# Altium PCB led.PcbDoc
Units mm, origin at the board's own origin, x right, y up, seen from the top; angles counter-clockwise.
Board outline 56.77 x 43.05 mm, 2 copper layers (Top Layer, Bottom Layer); 18 components, 16 nets, 57 pads, 0 vias.
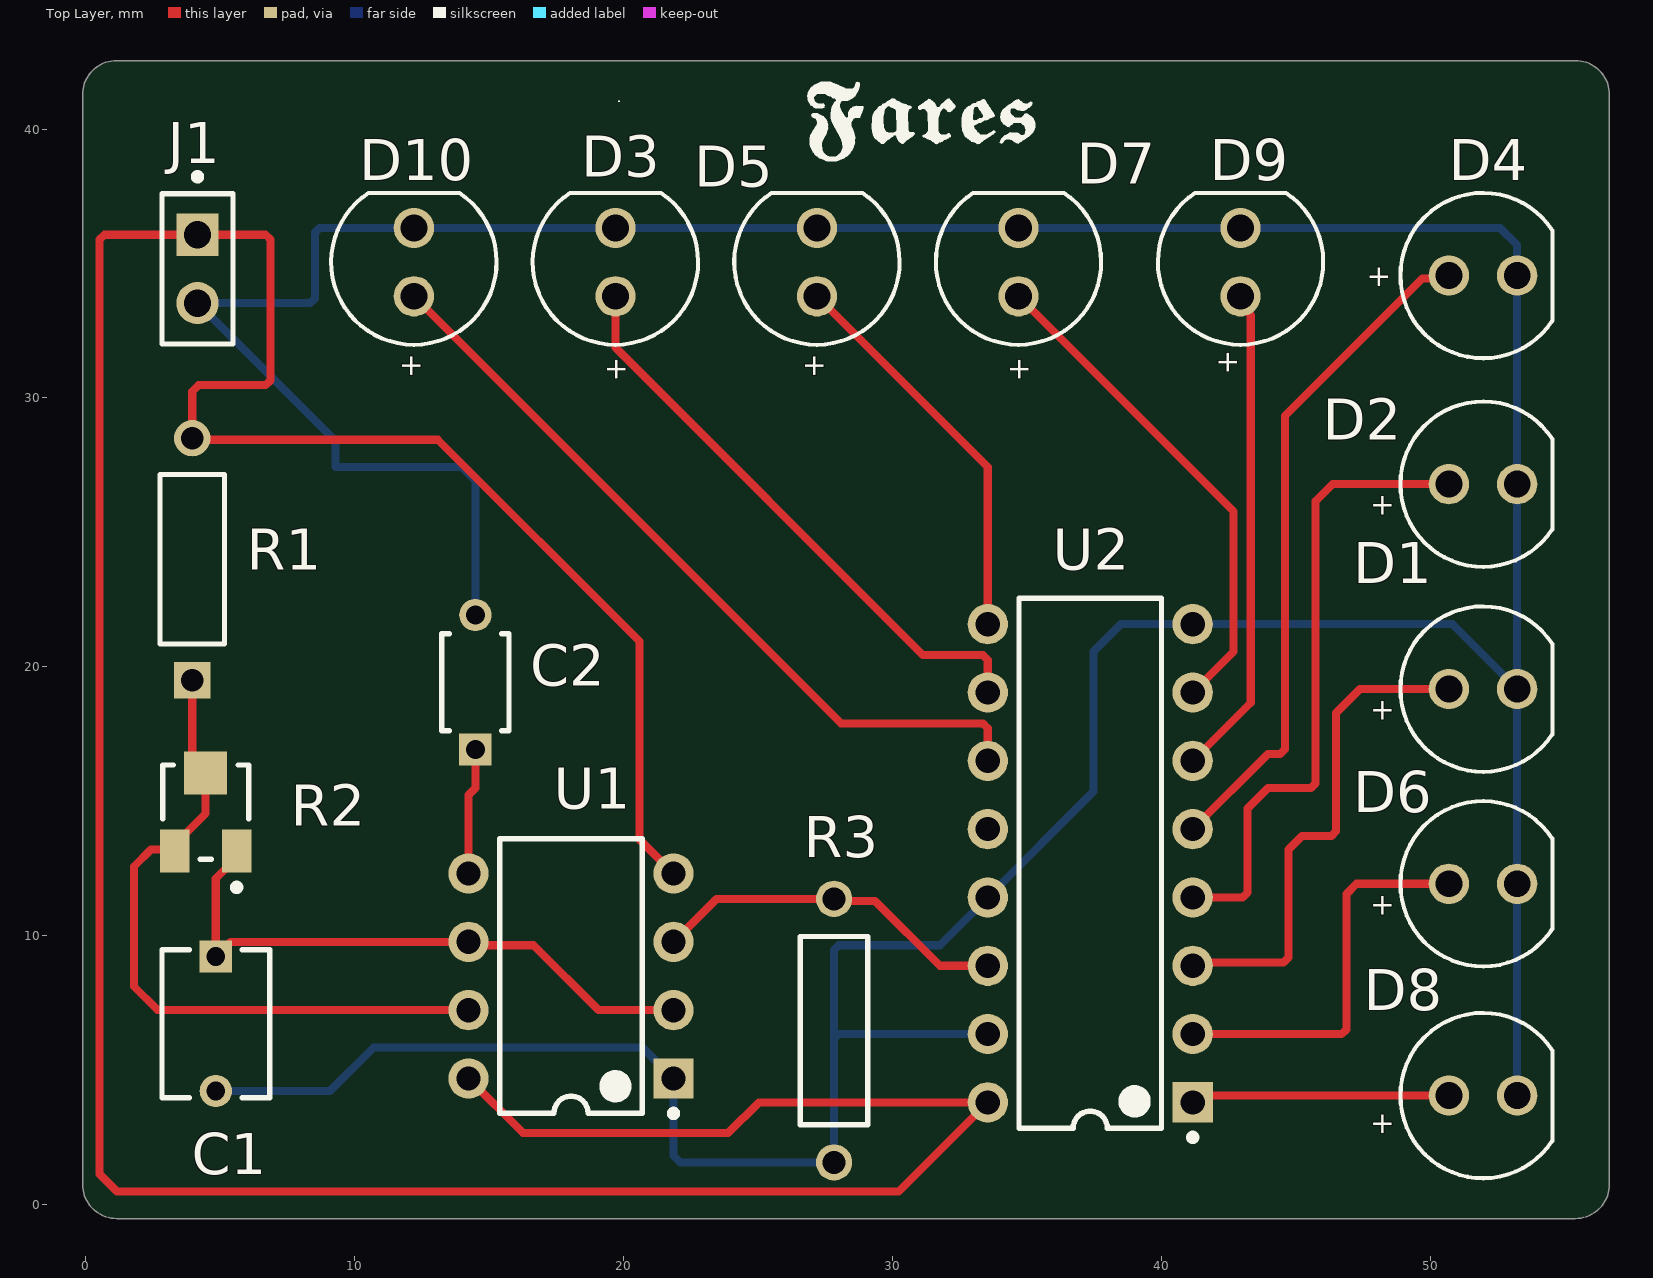
[diagram p0: Top Layer view]
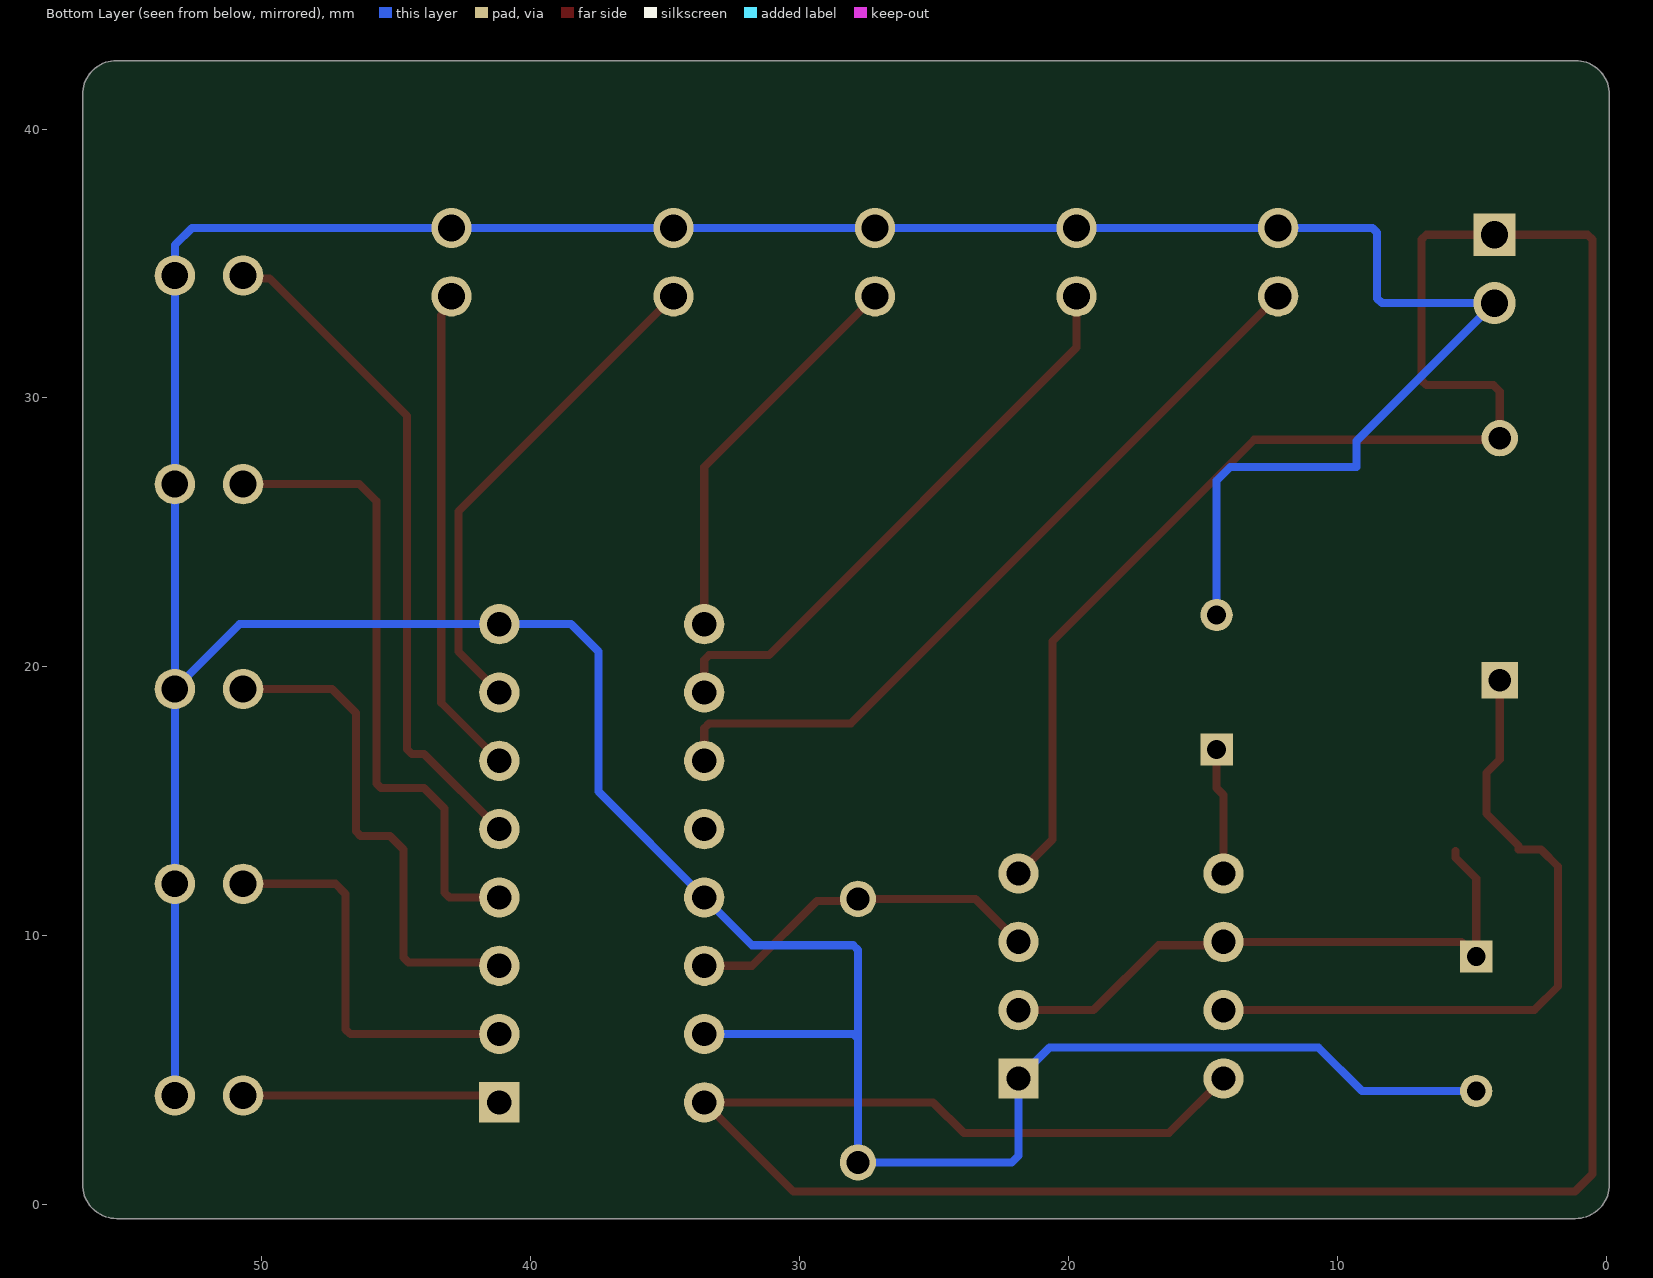
[diagram p1: Bottom Layer view, seen from below]
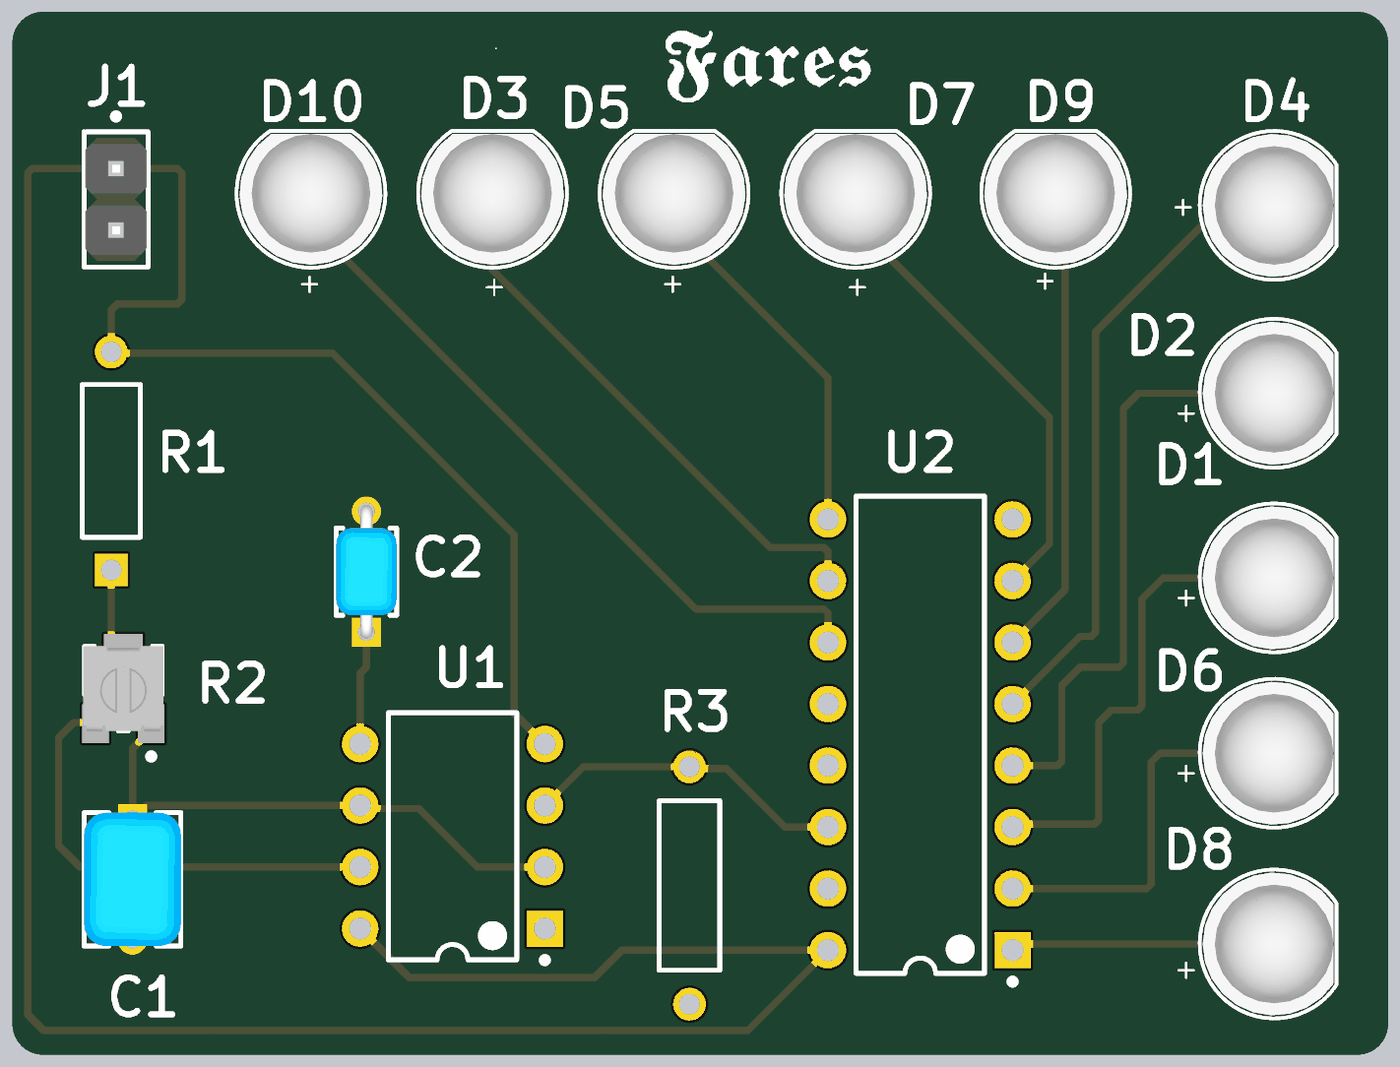
[diagram p2: 3D render of the assembled board from above, using the file's embedded part models]

## Layer stack, top to bottom
Top Solder: solder mask 0.0102, Solder Resist, Dk 3.5
Top Layer: signal copper 0.0356
Dielectric 1: dielectric 0.32, FR-4, Dk 4.8
Bottom Layer: signal copper 0.0356
Bottom Solder: solder mask 0.0102, Solder Resist, Dk 3.5

## Board outline
-0.127,0.762 ccw(c1.143,0.762) 1.143,-0.508 55.372,-0.508 ccw(c55.372,0.762) 56.642,0.762 56.642,41.275 ccw(c55.372,41.275) 55.372,42.545 1.143,42.545 ccw(c1.143,41.275) -0.127,41.275

## Design rules (kind name [scope] priority, off if disabled: settings)
Clearance [All] p1: gap=0.254 ignorepadtopadclearanceinfootprint=FALSE except(0: Arc-Hole Track-Hole SMDPad-Hole THPad-Hole Via-Hole Fill-Hole Poly-Hole Region-Hole Text-Hole)
PolygonConnect [All] p1: connectstyle=Relief reliefconductorwidth=0.254 reliefentries=4 polygonreliefangle="90 Angle" airgapwidth=0.254
RoutingVias [All] p1: holewidth=0.3 width=0.5 viastyle="Through Hole" minholewidth=0.3 minwidth=0.5 maxholewidth=0.3 maxwidth=0.5
SolderMaskExpansion [All] p1: expansion=0.102 istentingtop=FALSE
Width [All] p1: maxlimit=0.5 minlimit=0.1 preferedwidth=0.3
30 further rules are at their usual default settings.

## Components (designator, comment, footprint, x,y, rotation, side; value= is the part's Value field where it differs from the comment)
C1 "RCER71E226MWM1H03A" FP-RCEWM1-MFG 4.826,6.731 r270 top
C2 "RCER71H103K0K1H03B" FP-RCE0K1-MFG 14.478,19.431 r90 top
D1 "151051BS04000" WL-TMRC_D5.9H8.7 51.943,19.177 r0 top
D2 "151051BS04000" WL-TMRC_D5.9H8.7 51.943,26.797 r0 top
D3 "151051BS04000" WL-TMRC_D5.9H8.7 19.685,35.052 r90 top
D4 "151051BS04000" WL-TMRC_D5.9H8.7 51.943,34.552 r0 top
D5 "151051BS04000" WL-TMRC_D5.9H8.7 27.178,35.052 r90 top
D6 "151051BS04000" WL-TMRC_D5.9H8.7 51.943,11.938 r0 top
D7 "151051BS04000" WL-TMRC_D5.9H8.7 34.671,35.052 r90 top
D8 "151051BS04000" WL-TMRC_D5.9H8.7 51.943,4.064 r0 top
D9 "151051BS04000" WL-TMRC_D5.9H8.7 42.926,35.052 r90 top
D10 "151051BS04000" WL-TMRC_D5.9H8.7 12.192,35.052 r90 top
J1 "M20-9990246" FP-M20-9990246-MFG 4.146,34.798 r270 top
R1 "MFR-25FBF52-1M" RESA60-630X240 3.951,24.003 r90 top
R2 "3313J-1-503E" BOUR-3313J-1_V 4.451,14.605 r90 top
R3 "OD103JE" OMTE-RES7X2.5-2 27.813,6.477 r90 top
U1 "NE555P" P0008A 18.034,8.509 r180 top
U2 "CD74HC4017E" N0016A 37.338,12.7 r180 top

## Footprints (in the part's own frame and the unit in brackets; to place one, negate y for a bottom-side part, rotate by r counter-clockwise, add the part's x,y. Pads: shape width x height; smd on the part's side, far side on the other; paste and mask are expansions set on the pad)
BOUR-3313J-1_V [mm] "SMD, 3-Leads, Body 3.5x3.2mm, Pitch 1.15mm"
  rect 1.6x1.1 smd paste+0: 1(-1.45,-1.15) 3(-1.45,1.15)
  rect 1.6x1.6 smd paste+0: 2(1.45,0)
  silkscreen extent -2.92,-1.6 1.75,1.6, body extent -1.75,-1.65 1.75,1.65, height 2.11
FP-M20-9990246-MFG [mm]
  rect 1.57x1.57 hole 1.02 paste-1000 mask+0: 1(-1.27,0)
  round 1.57 hole 1.02 paste-1000 mask+0: 2(1.27,0)
  silkscreen extent -3.55,-1.32 2.79,1.32, body extent -2.89,-1.42 2.89,1.42, height 0.25
FP-RCE0K1-MFG [mm]
  rect 1.2x1.2 hole 0.7 paste-1000 mask+0: 1(-2.5,0)
  round 1.2 hole 0.7 paste-1000 mask+0: 2(2.5,0)
  silkscreen extent -1.8,-1.25 1.8,1.25, body extent -3.2,-1.35 3.2,1.35, height 0.25
FP-RCEWM1-MFG [mm]
  rect 1.2x1.2 hole 0.7 paste-1000 mask+0: 1(-2.5,0)
  round 1.2 hole 0.7 paste-1000 mask+0: 2(2.5,0)
  silkscreen extent -2.75,-2 2.75,2, body extent -3.2,-2.1 3.2,2.1, height 0.25
N0016A [mm] "DIP, 16-Leads, Body 19.7x6.6mm, Pitch 2.54mm"
  rect 1.5x1.5 hole 0.9: 1(-3.81,8.89)
  round 1.5 hole 0.9: 2(-3.81,6.35) 3(-3.81,3.81) 4(-3.81,1.27) 5(-3.81,-1.27) 6(-3.81,-3.81) 7(-3.81,-6.35) 8(-3.81,-8.89) 9(3.81,-8.89) 10(3.81,-6.35) 11(3.81,-3.81) 12(3.81,-1.27) 13(3.81,1.27) 14(3.81,3.81) 15(3.81,6.35) 16(3.81,8.89)
  silkscreen extent -3.94,-9.85 2.65,10.31, body extent -3.95,-9.85 3.95,9.85, height 5.08
OMTE-RES7X2.5-2 [mm] "Resistor, Axial; Body 7x2.5mm, Lead Dia. 0.6mm"
  round 1.35 hole 0.85: 1(-4.9,0) 2(4.9,0)
  silkscreen extent -3.5,-1.25 3.5,1.25, body extent -3.5,-1.25 3.5,1.25, height 2.5
P0008A [mm] "DIP, 8-Leads, Body 10.15x6.6mm, Pitch 2.54mm"
  rect 1.5x1.5 hole 0.9: 1(-3.81,3.81)
  round 1.5 hole 0.9: 2(-3.81,1.27) 3(-3.81,-1.27) 4(-3.81,-3.81) 5(3.81,-3.81) 6(3.81,-1.27) 7(3.81,1.27) 8(3.81,3.81)
  silkscreen extent -3.94,-5.1 2.65,5.23, body extent -3.95,-5.07 3.95,5.07, height 5.08
RESA60-630X240 [mm] "Axial Resistor, 2-Leads, Dia 2.4mm, Body Length 6.3mm"
  rect 1.35x1.35 hole 0.85: 1(-4.5,0)
  round 1.35 hole 0.85: 2(4.5,0)
  silkscreen extent -3.15,-1.2 3.15,1.2, body extent -3.15,-1.2 3.15,1.2, height 2.4
WL-TMRC_D5.9H8.7 [mm] "THT Mono-color Round Color LED, 2-leads"
  round 1.5 hole 1: 1(-1.27,0) 2(1.27,0)
  silkscreen extent -3.07,-3.07 2.58,3.08, body extent -2.95,-2.95 2.45,2.95, height 9.2

## Part data
C1: library part CMP-06035-003622-1, "CAP CER 22UF 25V X7R RADIAL", Capacitance=22uF, Case/Package=Radial, Dielectric=X7R, Max Operating Temperature=125°C, Min Operating Temperature=-55°C, Package Quantity=1500, Ratings=AEC-Q200, Resistor Type=Ceramic, Tolerance=20%, Voltage Rating=25V, Height=7.5mm, Height - Seated (Max)=0.295inch, Lead Diameter=0.5mm, Lead Pitch=0.197inch, Lead/Base Style="Formed Leads", Length=0.217inch, Mount="Through Hole", Packaging="Tape and Reel", Termination=Radial, Voltage Rating (DC)=25V, Width=0.157inch
C2: library part CMP-06035-044411-1, "Cap Ceramic 10nF 50V X7R ±10% Radial 5mm +125°C Automotive Bulk", Capacitance=10nF, Case/Package=Radial, Dielectric=X7R, Max Operating Temperature=125°C, Min Operating Temperature=-55°C, Package Quantity=500, Ratings=AEC-Q200, Resistor Type=Ceramic, Tolerance=10%, Voltage Rating=50V, Height=3.5mm, Height - Seated (Max)=0.138inch, Lead Diameter=0.5mm, Lead Free="Lead Free", Lead Pitch=0.197inch, Lead/Base Style="Formed Leads", Length=0.142inch, Mount="Through Hole", Packaging=Bulk, Termination=Radial, Voltage Rating (DC)=50V, Width=0.098inch
D1 D2 D3 D4 D5 D6 D7 D8 D9 D10: library part CMP-1488-00009-2, Case/Package=Radial, Color=Blue, Forward Current=100mA, Forward Voltage=3.2V, Max Operating Temperature=85°C, Max Reverse Voltage (DC)=5V, Min Operating Temperature=-40°C, Test Current=20mA, Dominant Wavelength=470nm, Height=8.6mm, Length=5mm, Lens Size=5mm, Lens Style="Circular, Diffused, Round", Luminous Intensity=500mcd, Mount="Through Hole", NexarPartId=29717812, Packaging=Bulk, Peak Wavelength=465nm, REACH SVHC=Unknown, RoHS=Compliant, Viewing Angle=40°, Wavelength=470nm, Width=5mm
J1: library part CMP-15831-000009-1, "CONN HEADER VERT 2POS 2.54MM", Current Rating=3A, Manufacturer=Harwin, Temperature="-40°C to +105°C", Temperature Range High=+105°C, Temperature Range Low=-40°C, Automotive=No, Category=Conn, ComponentLink2Description=Datasheet, ComponentLink2URL=https://cdn.harwin.com/pdfs/M20-999.pdf, Conn Gender=Male, Conn Orientation=Vertical, Contact Material=Tin,Nickel, Device Class L1=Connectors, Device Class L2="Headers and Wire Housings", Device Class L3=unset, Digikey Description="CONN HEADER VERT 2POS 2.54MM", Height=8.99mm, Lead Free=Yes, Manufacturer Part Number=M20-9990246, Mouser Description="2.54mm (0.1\") Pitch SIL Vertical PC Tail Pin Header, 6.1mm mating pin height, tin, 2 contacts", Number Of Contacts=2, Number Of Rows=1, Octopart=https://octopart.com/m20-9990246-harwin-2590635, Package=M20-9990246, Pitch=2.54mm, RoHS=TRUE
R1: library part CMP-1659-00070-1, "Axial Resistor, 1 MOhm, +/- 1%, 250 mW, -55 to 155 degC, 2-Pin THD, RoHS, Bulk", Case\Package=Axial, Max Operating Temperature="155 degC", Min Operating Temperature="-55 degC", Package Quantity=200, Power Rating="250 mW", Resistance="1M Ohm", Tolerance=1%, Voltage Rating="250 V", ComponentLink1Description="Manufacturer URL", ComponentLink1URL=http://www.yageo.com/, ComponentLink2Description=Datasheet, ComponentLink2URL=http://www.yageo.com/documents/recent/Yageo%20LR_MFR_2013.pdf, DatasheetVersion=Apr-13, Length="0.248 inch", Mount="Through Hole", PackageDescription="2-Pin Axial Lead, Dia 2.4 mm, Body Length 6.3 mm", PackageReference=MFR-25, Packaging=Bulk, RoHSCompliant=true
R2: library part CMP-2000-05588-1, "3 mm Trimpot(R) Trimming Potentiometer, 50 KOhm, +/- 20%, 0.125 W, -55 to 125 degC, 3-Pin SMD, RoHS, Tape and Reel", Manufacturer=Bourns, Package Description="3-Pin Surface Mount Device, Body 3.5 x 3.2 mm, Pitch 1.15 mm", Package Reference=3313J-1, Power Rating=125mW, Resistance Tolerance=±20%, Temperature Coefficient=±150ppm/°C, Track Resistance=50kohm, Datasheet URL=http://www.bourns.com/docs/Product-Datasheets/3313.pdf, Datasheet Version=05/2016, Manufacturer URL=http://www.bourns.com/, Mounting Technology=SurfaceMount, No. of Turns=1, Potentiometer Mounting=SMD, SVHC=NoSVHC(19-Dec-2012)
R3: library part CMP-2000-06865-1, "Little Demon(R) Carbon Composition Molded OD Series, 250 V, 10 KOhm, +/-5%, -70 to 130 degC, 2-Pin THD, RoHS, Bulk", Manufacturer=Ohmite, Operating Temperature=-, Package / Case=Axial, Package Description="2-Pin THD Resistor, Body 7 x 2.5 mm, Lead Dia. 0.6 mm", Package Reference=RES7X2.5, Power (Watts)=0.25W,1/4W, Power Rating=0.25W, Resistance (Ohms)=10k, Standard Package=100, Tolerance=±5%, Catalog Drawings=OD,OF,OASeries, Category=Resistors, Composition=CarbonComposition, Datasheet URL=http://www.ohmite.com/cat/res_od_of_oa.pdf, Datasheet Version=06/2016, EDA / CAD Models=DownloadfromAcceleratedDesigns, Family=ThroughHoleResistors, Features=PulseWithstanding, Height=-, Manufacturer URL=http://www.ohmite.com/, Mounting Technology=ThroughHole, Number of Terminations=2, Online Catalog=OD,OF,OASeries,LittleDemon®, Packaging=Bulk, PartNumber=OD103JE, RoHS Information="LittleDemon\"E\"SeriesMaterialDeclaration", Series=LittleDemon®OD, Size / Dimension="0.098\"Diax0.276\"L(2.50mmx7.00mm)", Supplier Device Package=Axial, Temperature Coefficient=-
U1: library part CMP-2000-04954-1, "Precision Timer, 4.5 to 16 V, 0 to 70 degC, 8-Pin DIP, Pb-Free, Tube", Manufacturer=TexasInstruments, Maximum High Level Output Current=-200mA, Maximum Low Level Output Current=200mA, Operating Supply Voltage=5, Package=8PDIP, Package Description="8-Pin Double In-line Package, Body 9.59 x 6.35 mm, Pitch 2.54 mm", Package Reference=P8, Category=Timer, Datasheet URL=http://www.ti.com/general/docs/lit/getliterature.tsp?genericPartNumber=NE555&fileType=pdf, Datasheet Version="Rev. I, 09/2014", Manufacturer URL=http://www.ti.com/, Number of Internal Timers=1, Package URL=http://www.ti.com/lit/ml/mpdi001b/mpdi001b.pdf, Packaging=Rail/Tube, Rad Hard=No, Type=Standard
U2: library part CMP-1623-00548-2, "High Speed CMOS Logic Decade Counter/Divider with 10 Decoded Outputs, N0016A, TUBE", F @ Nom Voltage(Max)(Mhz)=28, Generic Part Number=CD74HC4017, ICC @ Nom Voltage(Max)(mA)=0.08, Manufacturer="Texas Instruments", Operating Temperature Range(C)="-55 to 125", Rating=Catalog, tpd @ Nom Voltage(Max)(ns)=54, Voltage(Nom)(V)=3.3,5, Bits(#)=10, Code_JEDEC=MS-001, DatasheetVersion=SCHS200D, Function=Counter, Input Type=LVTTL/CMOS, Inputs=1, Output Drive (IOL/IOH)(Max)(mA)=5.2/-5.2, Output Type=CMOS, PackageReference=N0016A, Schmitt Trigger=No, Technology Family=HC, Type=Decade, VCC(Max)(V)=6, VCC(Min)(V)=2

## Nets (pads, with @x,y where several pads share a name; then routed paths per layer and width w, separated by ;. In a path a pad name is that pad's centre, name@x,y a point inside that pad or via, vN(x,y) a via of type N, cw(c..) or ccw(c..) an arc to the next point about the centre after c; other vN are vias at no path point)
GND: C1.2 C2.2 D1.2 D2.2 D3.2 D4.2 D5.2 D6.2 D7.2 D8.2 D9.2 D10.2 J1.2 R3.1 U1.1 U2.8 U2.13 U2.15 | length 177.4
  Bottom Layer w0.3: C1.2 9.075,4.231 10.697,5.853 20.69,5.853 U1.1 21.844,1.827 22.094,1.577 R3.1 27.813,6.174 ; C2.2 14.478,26.924 13.97,27.432 9.271,27.432 9.271,28.403 J1.2 8.333,33.528 8.509,33.704 8.509,36.146 8.685,36.322 D10.2 D3.2 D5.2 D7.2 D9.2 52.578,36.322 53.213,35.687 D4.2 D2.2 D1.2 ; U2.15 27.989,6.35 27.813,6.174 ; D8.2 D6.2 D1.2 ; 27.813,6.174 27.813,9.476 27.989,9.652 31.75,9.652 U2.13 37.465,15.367 37.465,20.574 38.481,21.59 U2.8 50.8,21.59 D1.2
NetC1_1: C1.1 R2.1 U1.2 U1.6 | length 22.5
  Top Layer w0.3: R2.1 5.601,12.905 4.826,12.13 C1.1 5.374,9.779 U1.6 14.351,9.652 16.637,9.652 19.05,7.239 U1.2
NetC2_1: C2.1 U1.5 | length 5.1
  Top Layer w0.3: U1.5 14.224,15.24 14.478,15.494 C2.1 C2.1@14.224,16.677
NetD1_1: D1.1 U2.3 | length 18.7
  Top Layer w0.3: U2.3 41.275,9.017 44.528,9.017 44.704,9.193 44.704,13.208 45.212,13.716 46.306,13.716 46.482,13.892 46.482,18.288 47.371,19.177 D1.1
NetD2_1: D2.1 U2.4 | length 23.9
  Top Layer w0.3: U2.4 43.004,11.43 43.18,11.606 43.18,14.732 43.942,15.494 45.544,15.494 45.72,15.67 45.72,26.162 46.355,26.797 D2.1
NetD3_1: D3.1 U2.10 | length 21.8
  Top Layer w0.3: D3.1 19.685,31.877 31.126,20.436 33.352,20.436 33.528,20.26 U2.10
NetD4_1: D4.1 U2.5 | length 25.3
  Top Layer w0.3: U2.5 43.942,16.764 44.401,16.764 44.577,16.94 44.577,29.337 49.684,34.444 50.565,34.444 D4.1
NetD5_1: D5.1 U2.9 | length 14.8
  Top Layer w0.3: D5.1 33.528,27.432 U2.9
NetD6_1: D6.1 U2.2 | length 14.8
  Top Layer w0.3: U2.2 46.687,6.35 46.863,6.526 46.863,11.557 47.244,11.938 D6.1
NetD7_1: D7.1 U2.7 | length 18.7
  Top Layer w0.3: D7.1 42.672,25.781 42.672,20.574 U2.7
NetD8_1: D8.1 U2.1 | length 9.6
  Top Layer w0.3: U2.1 41.402,4.064 D8.1
NetD9_1: D9.1 U2.6 | length 18.3
  Top Layer w0.3: U2.6 43.307,18.669 43.307,33.076 42.926,33.457 D9.1
NetD10_1: D10.1 U2.11 | length 29.2
  Top Layer w0.3: D10.1 28.078,17.896 33.352,17.896 33.528,17.72 U2.11
NetR1_1: R1.1 R2.2 R2.3 U1.7 | length 26
  Top Layer w0.3: R1.1 3.951,16.555 R2.2 4.451,14.555 3.248,13.352 3.248,13.208 2.413,13.208 1.778,12.573 1.778,8.128 2.667,7.239 U1.7
NetR3_2: R3.2 U1.3 U2.14 | length 13.4
  Top Layer w0.3: U1.3 23.442,11.377 R3.2 27.887,11.303 29.337,11.303 31.75,8.89 U2.14
VCC: J1.1 R1.2 U1.4 U1.8 U2.16 | length 135.5
  Top Layer w0.3: U1.8 16.256,2.667 23.876,2.667 25.019,3.81 U2.16 30.216,0.498 1.153,0.498 0.508,1.143 0.508,35.892 0.684,36.068 J1.1 6.682,36.068 6.858,35.892 6.858,30.656 6.682,30.48 4.191,30.48 3.951,30.24 R1.2 4.006,28.448 13.081,28.448 20.574,20.955 20.574,13.589 U1.4
pads on no net: U2.12

## Silkscreen, mask and mechanical layers (free items; w line width, h text height)
Top Overlay:
  drawing of 6 lines, arcs and shapes, not listed

## Text inside footprints (layer, text, board x,y; h text height)
D1: Top Overlay "+" at 47.752,18.034 h0.8
D2: Top Overlay "+" at 47.752,25.654 h0.8
D3: Top Overlay "+" at 20.066,30.607 h0.8 r90
D4: Top Overlay "+" at 47.625,34.163 h0.8
D5: Top Overlay "+" at 27.432,30.734 h0.8 r90
D6: Top Overlay "+" at 47.752,10.795 h0.8
D7: Top Overlay "+" at 35.052,30.607 h0.8 r90
D8: Top Overlay "+" at 47.752,2.667 h0.8
D9: Top Overlay "+" at 42.799,30.861 h0.8 r90
D10: Top Overlay "+" at 12.446,30.734 h0.8 r90